# Altium PCB МПСУ.464342.21-005 T5M 2Layer.PcbDoc
Units mm, origin at the board's own origin, x right, y up, seen from the top; angles counter-clockwise.
Board outline 115 x 95 mm, 2 copper layers (Top Layer, Bottom Layer), stack 0.579 mm thick; 67 components, 36 nets, 235 pads, 12 vias.
Unrouted connection lines stored in the file: 81.
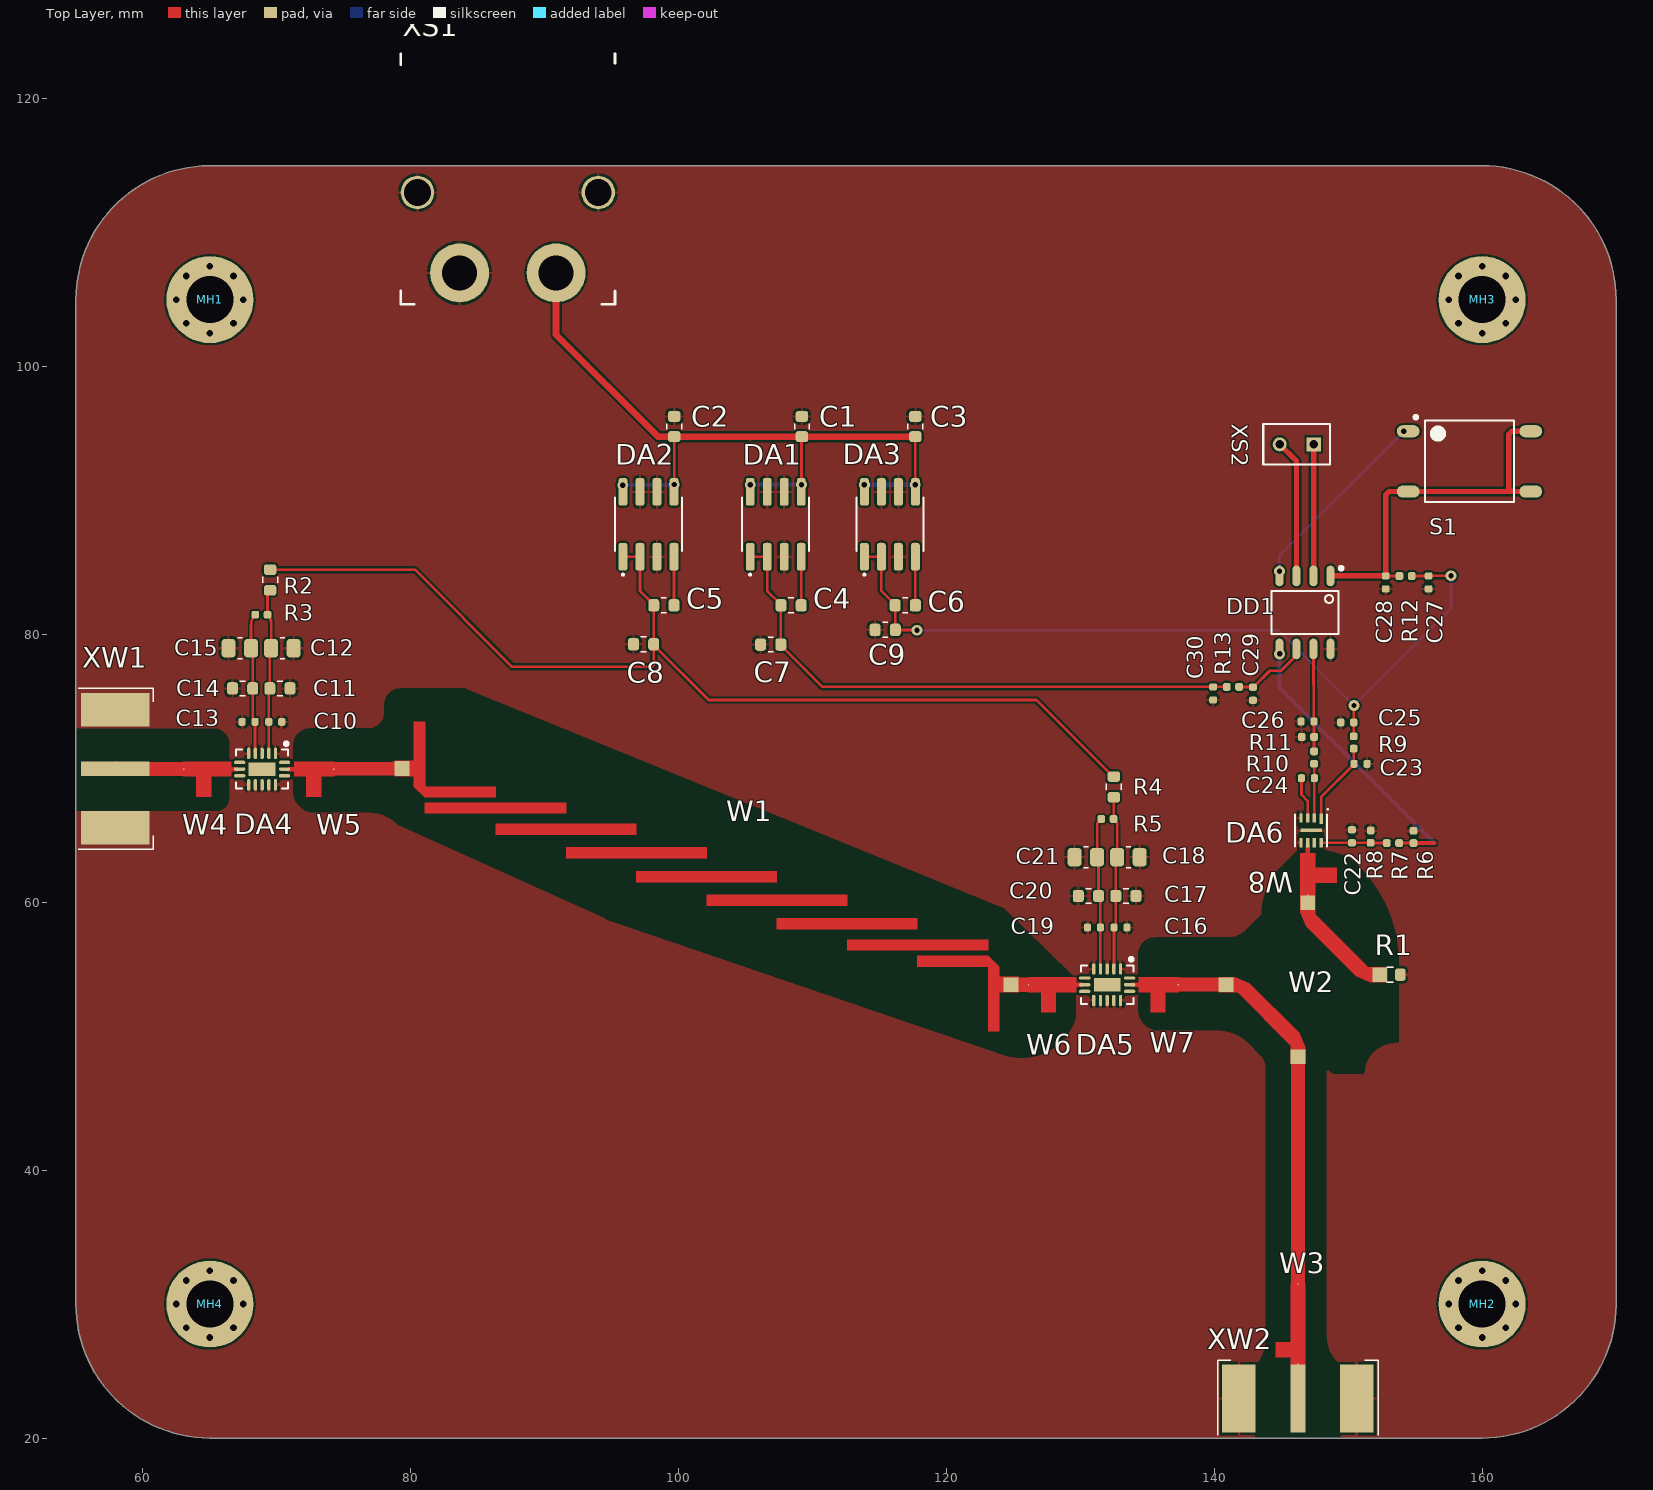
[diagram p0: Top Layer view]
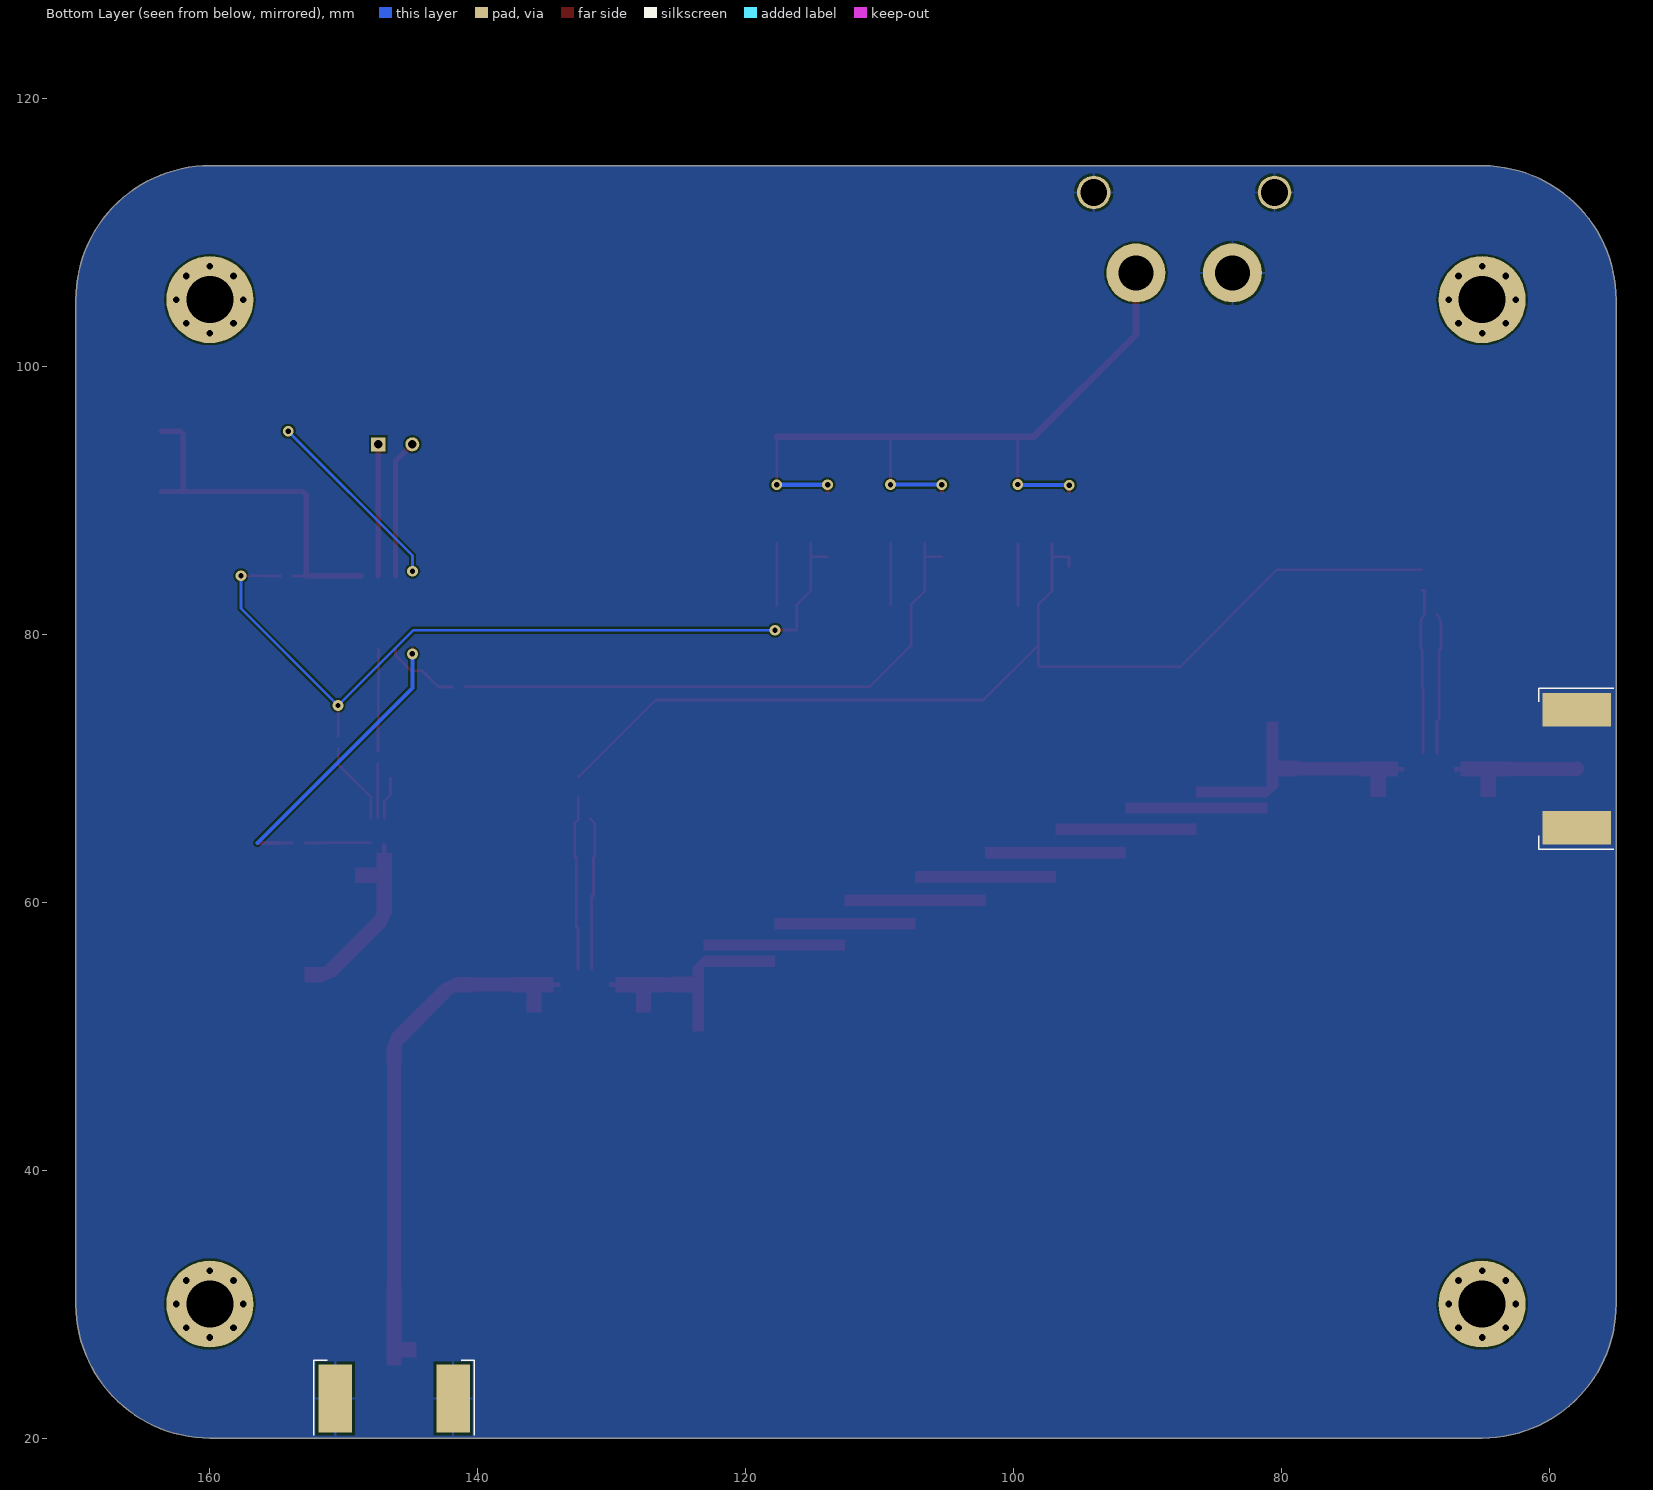
[diagram p1: Bottom Layer view, seen from below]

## Layer stack, top to bottom
Top Solder: solder mask 0.0102, Solder Resist, Dk 3.5
Top Layer: signal copper 0.0356
Dielectric 1: core 0.508, RO4350B, Dk 3.48
Bottom Layer: signal copper 0.0356
Bottom Solder: solder mask 0.0102, Solder Resist, Dk 3.5

## Board outline
54.999,30.036 55,104.987 cw(c65,105) 64.935,115 159.976,115 cw(c160,105) 170,104.973 170,29.948 cw(c160,30) 160.002,20 160.001,19.999 64.995,19.999 cw(c65,30)

## Design rules (kind name [scope] priority, off if disabled: settings)
AcuteAngle [All] p1: minimum=6.00000000000000E+0001 checktracksonly=FALSE
BoardOutlineClearance [OnCopper] p1: gap=0.25 ignorepadtopadclearanceinfootprint=FALSE except(0: Poly-OutlineEdge)
Clearance Clearance_RFGND [InComponentClass('RF') vs InNet('GND')] p1 off: gap=5 ignorepadtopadclearanceinfootprint=FALSE
Clearance [All] p2: gap=0.15 ignorepadtopadclearanceinfootprint=FALSE
ComponentClearance ComponentClearance_Matching [InComponentClass('RF')] p1: gap=-3 collisioncheckmode=3 verticalgap=2540 showdistances=FALSE
ComponentClearance [All] p2: gap=0.2 collisioncheckmode=3 verticalgap=2540 showdistances=TRUE
HoleSize [All] p1: absolutevalues=TRUE maxlimit=3.5 minlimit=0.4 maxpercent=80.000 minpercent=20.000
HoleToHoleClearance [All] p1: gap=0.2 allowstackedmicrovias=FALSE
MinimumAnnularRing MinimumAnnularRingVIA [IsVia] p1: minimumring=0.15
MinimumAnnularRing MinimumAnnularRingPAD [IsPad] p2: minimumring=0.2
MinimumSolderMaskSliver [All] p1: minsoldermaskwidth=0.15
PermittedLayers [All] p1: toplayerpermitted=TRUE bottomlayerpermitted=TRUE
PolygonConnect PolygonConnectMH [HasFootprint('MH_M3')] p1: connectstyle=Relief reliefconductorwidth=0.3 reliefentries=4 polygonreliefangle="90 Angle" airgapwidth=0.5
PolygonConnect PolygonConnectFilterGND [IsPad and InComponent('W1') and InNet('GND')] p2: connectstyle=Direct reliefconductorwidth=0.254 reliefentries=4 polygonreliefangle="90 Angle" airgapwidth=0.254
PolygonConnect PolygonConnectRFCons [InComponentClass('RFCons') and InNet('GND')] p3: connectstyle=Direct reliefconductorwidth=0.254 reliefentries=4 polygonreliefangle="90 Angle" airgapwidth=0.254
PolygonConnect PolygonConnectGNDVia [IsVia and InNet('GND')] p4: connectstyle=Direct reliefconductorwidth=0.254 reliefentries=4 polygonreliefangle="90 Angle" airgapwidth=0.254
PolygonConnect PolygonConnectRF [InNet('GND') and InComponentClass('RF')] p5: connectstyle=Relief reliefconductorwidth=0.2 reliefentries=4 polygonreliefangle="90 Angle" airgapwidth=0.2
PolygonConnect [All] p6: connectstyle=Relief reliefconductorwidth=0.2 reliefentries=4 polygonreliefangle="90 Angle" airgapwidth=0.2
RoutingCorners RoutingCorners_RF [InNetClass('RF')] p1: cornerstyle=Round minsetback=1.1 maxsetback=5
RoutingCorners [All] p2: cornerstyle=45-Degree minsetback=2.54 maxsetback=2.54
RoutingLayers RoutingLayersRF [InNetClass('RF')] p1: top layer_v5=TRUE bottom layer_v5=FALSE
RoutingLayers [All] p2: top layer_v5=TRUE bottom layer_v5=TRUE
RoutingVias [All] p1: holewidth=0.4 width=0.8 viastyle="Through Hole" minholewidth=0.4 minwidth=0.8 maxholewidth=0.4 maxwidth=0.8
SilkToSilkClearance [All] p1: silktosilkclearance=0.15
SilkToSolderMaskClearance [IsPad] p1: minsilkscreentomaskgap=0.15 clearancetoexposedcopper=TRUE
SolderMaskExpansion SolderMaskExpansionGNDVia [IsVia and InNet('GND')] p1: expansion=0.102 istentingtop=TRUE
SolderMaskExpansion [All] p2: expansion=0.05 istentingtop=FALSE
UnConnectedPin [All] p1:
Width WidthRF [InNetClass('RF')] p1: maxlimit=1.15 minlimit=1.05 preferedwidth=1.1
Width [All] p2: maxlimit=0.5 minlimit=0.2 preferedwidth=0.3
22 further rules are at their usual default settings.

## Classes and differential pairs
component class RFCons: XW1
component class RFDevices: DA4 DA5 DA6
component class RF: W1 W2 W3 W4 W5 W6 W7 W8
channel class "МПСУ.464342.21-005 Э3 Лист2": LNA1 LNA2
net class RF: LNA_RF_IN_LNA1 LNA_RF_IN_LNA2 LNA_RF_OUT_LNA1 LNA_RF_OUT_LNA2 LTC_RF_IN NetDA4_7 NetDA4_15 NetDA5_7 NetDA5_15 NetDA6_6 NetR1_2 NetW2_3 NetW3_2
component class "МПСУ.464342.21-005 Э3 Лист8": R1 W1 W2 W3 XS1 XW1 XW2
component class PowerManagment: C1 C2 C3 C4 C5 C6 C7 C8 C9 DA1 DA2 DA3
component class PowerDetector: C22 C23 C24 C25 C26 DA6 R6 R7 R8 R9 R10 R11 W8
component class Microcontroller: C27 C28 C29 C30 DD1 R12 R13 S1 XS2
component class LNA2: C16 C17 C18 C19 C20 C21 DA5 R4 R5 W6 W7
component class LNA1: C10 C11 C12 C13 C14 C15 DA4 R2 R3 W4 W5

## Components (designator, comment, footprint, x,y, rotation, side; value= is the part's Value field where it differs from the comment)
C1 "1 uF" CAPC160X80X90L30N 109.205,95.528 r270 top value="100 pF"
C2 "1 uF" CAPC160X80X90L30N 99.675,95.528 r270 top value="100 pF"
C3 "1 uF" CAPC160X80X90L30N 117.678,95.526 r270 top value="100 pF"
C4 "10 pF" CAPC160X80X90L30N 108.4,82.173 r0 top value="100 pF"
C5 "10 pF" CAPC160X80X90L30N 98.9,82.173 r0 top value="100 pF"
C6 "10 pF" CAPC160X80X90L30N 116.925,82.173 r0 top value="100 pF"
C7 "10 uF" CAPC160X80X90L30N 106.875,79.248 r0 top value="100 pF"
C8 "10 uF" CAPC160X80X90L30N 97.386,79.273 r0 top value="100 pF"
C9 "10 uF" CAPC160X80X90L30N 115.425,80.348 r0 top value="100 pF"
C10 "100 pF" CAPC100X50X55L20N 69.885,73.473 r180 top
C11 "1 uF" CAPC160X80X90L30N 70.23,75.973 r180 top value="100 pF"
C12 "0.33 uF" CAPC200X125X95L50N 70.415,78.973 r180 top value="100 pF"
C13 "100 pF" CAPC100X50X55L20N 67.89,73.473 r180 top
C14 "1 uF" CAPC160X80X90L30N 67.445,75.973 r180 top value="100 pF"
C15 "0.33 uF" CAPC200X125X95L50N 67.235,78.973 r180 top value="100 pF"
C16 "100 pF" CAPC100X50X55L20N 132.994,58.123 r180 top (schematic designator C10)
C17 "1 uF" CAPC160X80X90L30N 133.4,60.473 r180 top value="100 pF" (schematic designator C11)
C18 "0.33 uF" CAPC200X125X95L50N 133.59,63.373 r180 top value="100 pF" (schematic designator C12)
C19 "100 pF" CAPC100X50X55L20N 131.006,58.123 r180 top (schematic designator C13)
C20 "1 uF" CAPC160X80X90L30N 130.6,60.473 r180 top value="100 pF" (schematic designator C14)
C21 "0.33 uF" CAPC200X125X95L50N 130.41,63.373 r180 top value="100 pF" (schematic designator C15)
C22 "10 pF" CAPC100X50X55L20N 150.275,64.933 r270 top value="100 pF" (schematic designator C16)
C23 "OPT" CAPC100X50X55L20N 150.92,70.336 r180 top value="100 pF" (schematic designator C17)
C24 "10 nF" CAPC100X50X55L20N 146.99,69.273 r0 top value="100 pF" (schematic designator C18)
C25 "100 nF" CAPC100X50X55L20N 149.925,73.436 r0 top value="100 pF" (schematic designator C19)
C26 "1 uF" CAPC100X50X55L20N 146.96,73.498 r0 top value="100 pF" (schematic designator C20)
C27 "100 nF" CAPC100X50X55L20N 156,83.888 r90 top (schematic designator C21)
C28 "OPT" CAPC100X50X55L20N 152.8,83.888 r90 top (schematic designator C22)
C29 "OPT" CAPC100X50X55L20N 142.888,75.576 r90 top (schematic designator C23)
C30 "100 nF" CAPC100X50X55L20N 139.913,75.601 r90 top (schematic designator C24)
DA1 "LT1763-1.5" SOIC8P127_490X600X175L83X41N 107.25,88.223 r0 top
DA2 "LT1763-2.5" SOIC8P127_490X600X175L83X41N 97.75,88.223 r0 top
DA3 "LT1763-3.3" SOIC8P127_490X600X175L83X41N 115.775,88.223 r0 top
DA4 "PMA-183PLN+" JV2579 68.9,69.948 r180 top
DA5 "PMA-183PLN+" JV2579 132,53.848 r180 top (schematic designator DA4)
DA6 "LTC5597" LTC5597 147.225,65.373 r180 top (schematic designator DA5)
DD1 "PIC12F1822-I/SN" SN-SOIC127P600X175-8N 146.77,81.648 r270 top
MH1 "Comment" MH_M3 65,105 r0 top
MH2 "Comment" MH_M3 160,30 r0 top
MH3 "Comment" MH_M3 160,105 r0 top
MH4 "Comment" MH_M3 65,30 r0 top
R1 "50 Ohm" RESC160X80X60L30N 153.12,54.598 r180 top value=10
R2 "10 Ohm" RESC160X80X60L30N 69.5,84.068 r270 top value=10
R3 "180 Ohm" RESC100X50X40L25N 68.85,81.473 r180 top value=10
R4 "10 Ohm" RESC160X80X60L30N 132.5,68.618 r270 top value=10 (schematic designator R2)
R5 "180 Ohm" RESC100X50X40L25N 132.015,66.223 r180 top value=10 (schematic designator R3)
R6 "OPT" RESC100X50X40L25N 154.875,64.883 r270 top value=10 (schematic designator R4)
R7 "2 kOhm" RESC100X50X40L25N 153.34,64.423 r180 top value=10 (schematic designator R5)
R8 "3 k" RESC100X50X40L25N 151.675,64.908 r270 top value=10 (schematic designator R6)
R9 "1 Ohm" RESC100X50X40L25N 150.41,71.936 r90 top value=10 (schematic designator R7)
R10 "100 Ohm" RESC100X50X40L25N 147.45,70.808 r90 top value=10 (schematic designator R8)
R11 "OPT" RESC100X50X40L25N 146.99,72.348 r0 top value=10 (schematic designator R9)
R12 "1 Ohm" RESC100X50X40L25N 154.285,84.363 r0 top (schematic designator R10)
R13 "1 Ohm" RESC100X50X40L25N 141.393,76.086 r180 top value=10 (schematic designator R11)
S1 "L-KLS7-TS6604-4.3-180-B" DIP2_SOIC450P1000X350-4N 159.05,92.925 r0 top
W1 "Filter" MFilter8_5G 78.8,69.996 r0 top net-tie
W2 "Colinear Coupler" CLCoupler 146.975,59.973 r270 top net-tie
W3 "Matching" MATCHING_MAIN_OUT 146.243,31.549 r270 top net-tie
W4 "Matching" MATCHING_LNA_IN 67.1,69.948 r0 top net-tie
W5 "Matching" MATCHING_LNA_OUT 70.8,69.948 r0 top net-tie
W6 "Matching" MATCHING_LNA_IN 130.175,53.848 r0 top net-tie (schematic designator W4)
W7 "Matching" MATCHING_LNA_OUT 133.85,53.848 r0 top net-tie (schematic designator W5)
W8 "Matching" MATCHING_LTC_IN 146.975,64.373 r90 top net-tie (schematic designator W6)
XS1 "XT-60-PW-F" XT-60-PW-F 87.25,107 r0 top
XS2 "PBD-2 2x1" RHDRV2W45P254_1X2_304X500H500 147.425,94.198 r270 top
XW1 "MOLEX 73251-1153" "MOLEX 73251-1153 - 1.1pin" 54.975,69.973 r0 top
XW2 "MOLEX 73251-1153" "MOLEX 73251-1153 - 1.1pin" 146.243,19.999 r90 top

## Footprints (in the part's own frame and the unit in brackets; to place one, negate y for a bottom-side part, rotate by r counter-clockwise, add the part's x,y. Pads: shape width x height; smd on the part's side, far side on the other; paste and mask are expansions set on the pad)
CAPC100X50X55L20N [mm] "Capacitor, Chip; 1.00 mm L X 0.50 mm W X 0.55 mm H body"
  rrect49% 0.53x0.58 smd: 1(-0.485,0) 2(0.485,0)
  body extent -0.5,-0.25 0.5,0.25, height 0.55
CAPC160X80X90L30N [mm] "Capacitor, Chip; 1.60 mm L X 0.80 mm W X 0.90 mm H body"
  rrect51% 0.82x0.93 smd: 1(-0.755,0) 2(0.755,0)
  silkscreen extent -0.2,-0.55 0.2,0.55, body extent -0.8,-0.4 0.8,0.4, height 0.9
CAPC200X125X95L50N [mm] "Capacitor, Chip; 2.00 mm L X 1.25 mm W X 0.95 mm H body"
  rrect48% 1.05x1.38 smd: 1(-0.84,0) 2(0.84,0)
  silkscreen extent -0.17,-0.78 0.17,0.78, body extent -1,-0.63 1,0.63, height 0.95
CLCoupler [mm] "Coupler 40 dB, diel RO4003 0.5 oz ED 20 mil"
  rect 1.1x1.1 smd paste-0.55 mask-0.55: 1(0,0) 2(5.375,5.375) 3(11.5,-0.725) 4(6.125,-6.1)
  Top Layer region: -0.55,-0.55 -0.55,0.55 0.875,0.549 0.987,0.67 4.713,4.397 4.825,4.5 4.825,5.925 5.925,5.925 5.925,4.675 5.491,3.619 1.765,-0.108 0.7,-0.55
  Top Layer region: 5.575,-6.65 5.575,-5.42 6.007,-4.35 9.725,-0.625 10.8,-0.175 12.05,-0.175 12.05,-1.275 10.65,-1.275 10.525,-1.4 6.785,-5.128 6.675,-5.25 6.675,-6.65
DIP2_SOIC450P1000X350-4N [mm] "SOIP=C, 4-Leads, Body 6,00x6,00mm, Pitch 4,50mm, IPC Medium Density"
  oval 1.7x0.9 smd: 1(-4.575,2.25) 2(-4.575,-2.25) 3(4.575,-2.25) 4(4.575,2.25)
  silkscreen extent -4.12,-3.05 3.32,3.42, body extent -4.5,-3 4.5,3, height 7.17
JV2579 [mm] "QFN, 17-Leads, Body   2.5x3.5mm, Pitch 0.51mm, Thermal Pad 2x1mm, IPC Medium Density"
  oval 0.25x0.85 smd: 1(-1,-1.175) 2(-0.5,-1.175) 3(0,-1.175) 4(0.5,-1.175) 5(1,-1.175) 9(1,1.175) 10(0.5,1.175) 11(0,1.175) 12(-0.5,1.175) 13(-1,1.175)
  oval 0.85x0.25 smd: 6(1.675,-0.5) 7(1.675,0) 8(1.675,0.5) 14(-1.675,0.5) 15(-1.675,0) 16(-1.675,-0.5)
  rect 2x1 smd: 17(0,0)
  silkscreen extent -1.95,-2.02 1.95,1.45, body extent -1.8,-1.3 1.8,1.3, height 0.85
LTC5597 [mm] "DFN 8-Leads, Body 2,00x2,00mm, Pitch 0,50mm, Thermal Pad 1,60x0,25mm, IPC Medium Density"
  rect 0.25x0.8 smd: 1(-0.75,-0.875)
  rect 0.25x0.7 smd: 2(-0.25,-0.925) 3(0.25,-0.925) 4(0.75,-0.925) 5(0.75,0.925) 6(0.25,0.925) 7(-0.25,0.925) 8(-0.75,0.925)
  rect 1.6x0.25 smd: 9(0,0)
  silkscreen extent -1.3,-1.62 1.2,1.2, body extent -1.05,-1.1 1.05,1.1, height 0.8
MATCHING_LNA_IN [mm]
  rect 0.1x0.1 smd paste-0.05 mask-0.05: 1(-4.05,0) 2(0,0)
  Top Layer region: -3.1,-2.05 -3.1,-0.55 -4.1,-0.55 -4.1,0.55 -0.5,0.55 -0.5,0.15 0,0.15 0,-0.15 -0.5,-0.15 -0.5,-0.55 -2,-0.55 -2,-2.05
MATCHING_LNA_OUT [mm]
  rect 0.1x0.1 smd paste-0.05 mask-0.05: 1(0,0) 2(3.45,0)
  Top Layer region: 0.5,-0.55 0.5,-0.15 0,-0.15 0,0.15 0.5,0.15 0.5,0.55 3.5,0.55 3.5,-0.55 2.5,-0.55 2.5,-2.05 1.4,-2.05 1.4,-0.55
MATCHING_LTC_IN [mm]
  rect 0.1x0.1 smd paste-0.05 mask-0.05: 1(-3.85,0) 2(0,0)
  Top Layer region: -2.9,-2.15 -2.9,-0.55 -3.9,-0.55 -3.9,0.55 -0.7,0.55 -0.7,0.15 0,0.15 0,-0.15 -0.7,-0.15 -0.7,-0.55 -1.8,-0.55 -1.8,-2.15
MATCHING_MAIN_OUT [mm]
  rect 0.1x0.1 smd paste-0.05 mask-0.05: 1(0.05,0) 2(6.05,0)
  Top Layer region: 0,-0.55 0,0.55 6.1,0.55 6.1,-0.55 5.5,-0.55 5.5,-1.65 4.4,-1.65 4.4,-0.55
MFilter8_5G [mm] "Bandpass filter, Fc 8.50GHz, BW  500 MHz, type - Coupled Microstrip Filter, diel RO4003 0.5 oz ED 20 mil"
  rect 1.1x1.1 smd paste-0.55 mask-0.55: 1(0.55,0) 2(46.025,-16.146)
  Top Layer region: 0,-0.577 0,0.577 1.432,0.577 1.432,3.476 2.279,3.476 2.279,-1.352 7.555,-1.352 7.555,-2.146 2.253,-2.146 1.432,-1.352 1.432,-0.577
  Top Layer region: 2.253,-3.36 2.253,-2.566 12.8,-2.566 12.8,-3.36
  Top Layer region: 7.555,-4.962 18.045,-4.964 18.045,-4.14 7.555,-4.142
  Top Layer region: 12.8,-6.7 12.8,-5.877 18.045,-5.877 18.045,-5.876 23.293,-5.876 23.293,-6.7 18.045,-6.7 18.045,-6.7
  Top Layer region: 18.045,-8.485 18.045,-7.661 23.293,-7.661 28.541,-7.661 28.541,-8.485 23.293,-8.485
  Top Layer region: 23.293,-10.27 28.541,-10.27 28.541,-10.269 33.786,-10.269 33.786,-9.446 28.541,-9.446 28.541,-9.446 23.293,-9.446
  Top Layer region: 28.541,-12.006 33.786,-12.006 33.786,-12.004 39.031,-12.004 39.031,-11.184 33.786,-11.184 33.786,-11.182 28.541,-11.182
  Top Layer region: 33.786,-13.581 33.786,-12.786 44.333,-12.786 44.333,-13.581
  Top Layer region: 44.307,-15.568 44.307,-14.794 39.031,-14.794 39.031,-14 44.333,-14 45.154,-14.794 45.154,-15.569 46.586,-15.569 46.586,-16.723 45.154,-16.723 45.154,-19.622 44.307,-19.622
MH_M3 [mm] "Mounting Hole M3 with 8 vias"
  round 0.8 hole 0.5: 1(-2.5,0) 1(-1.768,-1.768) 1(-1.768,1.768) 1(0,-2.5) 1(0,2.5) 1(1.768,-1.768) 1(1.768,1.768) 1(2.5,0)
  round 6.5 hole 3.5 paste-6.5: MH1(0,0)
"MOLEX 73251-1153 - 1.1pin" [mm] "MOLEX 50 Ohms, SMA Jack Receptacle, Edge Mount, .25µm Gold (Au) Plating"
  rect 5.1x1.1 smd: 1(2.95,0)
  rect 5.1x2.5 smd: 2(2.95,-4.4) 2(2.95,4.4)
  rect 5.1x2.5 smd far side: 2(2.95,-4.4) 2(2.95,4.4)
  silkscreen extent 0.2,-6 5.8,6, body extent -9.5,-4.76 4.77,4.76, height 4.36
RESC100X50X40L25N [mm] "Resistor, Chip; 1.00 mm L X 0.50 mm W X 0.40 mm H body"
  rrect52% 0.58x0.58 smd: 1(-0.46,0) 2(0.46,0)
  body extent -0.5,-0.25 0.5,0.25, height 0.4
RESC160X80X60L30N [mm] "Resistor, Chip; 1.60 mm L X 0.80 mm W X 0.60 mm H body"
  rrect51% 0.79x0.93 smd: 1(-0.77,0) 2(0.77,0)
  silkscreen extent -0.23,-0.56 0.23,0.56, body extent -0.8,-0.4 0.8,0.4, height 0.6
RHDRV2W45P254_1X2_304X500H500 [mm] "Header, Vertical Receptacle, 2.54 mm pitch; 0.45 mm lead width, 2 pins, 2 rows, 1 pin per row, 3.04 mm L X 5.00 mm W X 5.00 mm H body"
  rect 1.05x1.05 / inner round 1.05 / far side rect 1.05x1.05 hole 0.65 paste-1.05: 1(0,0)
  round 1.05 hole 0.65 paste-1.05: 2(0,-2.54)
  silkscreen extent -1.5,-3.77 1.5,1.23, body extent -1.52,-3.77 1.52,1.23, height 5
SN-SOIC127P600X175-8N [mm] "SOIC, 8-Leads, Body 4.90x3.90mm, Pitch 1.27mm, IPC Medium Density"
  oval 1.55x0.6 smd: 1(-2.725,1.905) 2(-2.725,0.635) 3(-2.725,-0.635) 4(-2.725,-1.905) 5(2.725,-1.905) 6(2.725,-0.635) 7(2.725,0.635) 8(2.725,1.905)
  silkscreen extent -3.42,-2.5 1.6,2.83, body extent -3,-2.5 3,2.5, height 1.75
SOIC8P127_490X600X175L83X41N [mm] "Small Outline IC (SOIC), 1.27 mm pitch; 8 pin, 4.90 mm L X 3.90 mm W X 1.75 mm H body"
  rrect52% 0.66x2.07 smd: 1(-1.905,-2.425) 2(-0.635,-2.425) 3(0.635,-2.425) 4(1.905,-2.425) 5(1.905,2.425) 6(0.635,2.425) 7(-0.635,2.425) 8(-1.905,2.425)
  silkscreen extent -2.5,-3.83 2.5,2, body extent -2.45,-3 2.45,3, height 1.75
XT-60-PW-F [mm]
  round 4.4 hole 2.6: 1(-3.6,0) 2(3.6,0)
  round 2.5 hole 2: 3(-6.75,6) 3(6.75,6)
  silkscreen extent -8,-2.35 8,16.35, body extent -7.75,-1.85 7.75,15.35, height 8.4

## Part data
C1 C2 C3 C4 C5 C6 C7 C8 C9 C10 C11 C12 C13 C14 C15 C16 C17 C18 C19 C20 C21 C22 C23 C24 C25 C26 C27 C28 C29 C30: library part Capacitor, "Capacitor, generic", Package=0402
DA1 DA2 DA3: library part LT1763, "Micropower DC/DC Converters in SOIC8", Manufacturer="Analog Devices"
DA4 DA5: "SMT Low Noise Amplifier, 6000 - 18000 MHz, 50Ω", Manufacturer=Mini-Circuits, ComponentLink1Description=ProductPage, ComponentLink1URL=https://www.minicircuits.com/WebStore/dashboard.html?model=PMA-183PLN%2B, PartNumber=PMA-183PLN+
DA6: "100MHz to 70GHz Linear-in-dB RMS Power Detector with 35dB Dynamic Range", Manufacturer="Analog Devices", ComponentLink1Description="Product Page", ComponentLink1URL=https://www.analog.com/en/products/ltc5597.html#product-overview, PartNumber=LTC5597
DD1: library part PIC12(L)F1822, "8-bit Flash Microcontrollers with XLP Technology 3.5 KB, 128 B", PartNumber=PIC12F1822-I/SN
R1 R2 R3 R4 R5 R6 R7 R8 R9 R10 R11 R12 R13: library part Resistor, "Resistor, generic", Package=0402
S1: library part KLS7-TS6601-7, "Tact Switch", Manufacturer="KLS electronic co ltd", ComponentLink1Description=DataSheet, ComponentLink1URL=https://static.chipdip.ru/lib/551/DOC001551970.pdf, PartNumber=L-KLS7-TS6604-4.3-180-B
W1: library part "Filter 8.5G", "Bandpass filter, Fc 8.50GHz, BW  500 MHz, type - Coupled Microstrip Filter, diel RO4003 0.5 oz ED 20 mil"
W2: library part CLCoupler, "Coupler 40 dB, diel RO4003 0.5 oz ED 20 mil"
W3 W8: library part Matching_1
W4 W5 W6 W7: library part Matching_1, "Matching MTEE"
XS1: "Header, Right-angle, 2x1", Manufactorer="Changzhou Amass Electronics CO.LTD.", Category=Connector, ComponentLink1Description=DataSheet, ComponentLink1URL=https://www.tme.eu/ru/Document/9b8d0c5eb7094295f3d3112c214d3ade/XT60PW%20SPEC.pdf, Net1=+12V, Net2=GND, PartNumber=XT-60-PW-F
XS2: library part PBD-2, "Header, Vertical Receptacle, 2.54 mm pitch 2x1", Net1=RX, Net2=TX, PartNumber="PBD-2 2x1"
XW1 XW2: "MOLEX 73251-1153 (SMA EDGE)", Manufacturer=Molex, PartNumber="MOLEX 73251-1153"

## Via types
v1: diameter 0.8, hole 0.4, Top Layer to Bottom Layer, 12 vias

## Nets (pads, with @x,y where several pads share a name; then routed paths per layer and width w, separated by ;. In a path a pad name is that pad's centre, name@x,y a point inside that pad or via, vN(x,y) a via of type N, cw(c..) or ccw(c..) an arc to the next point about the centre after c; other vN are vias at no path point)
+1.5V: C4.1 C7.2 C30.2 DA1.1 DA1.2 R13.2 | length 43.9
  Top Layer w0.2: DA1.1 DA1.2 ; DA1.2@106.615,86.798 106.615,83.258 107.645,82.228 C4.1 107.638,82.166 107.638,79.256 C7.2 107.63,79.193 110.738,76.086 C30.2 R13.2
+2.5V: C5.1 C8.2 DA2.1 DA2.2 R2.1 R4.1 | length 81.6
  Top Layer w0.2: R2.1 80.312,84.838 87.569,77.581 98.023,77.581 98.141,77.698 C8.2@98.141,79.218 ; DA2.1@95.845,85.083 DA2.1 DA2.2 ; DA2.2@97.115,86.798 97.115,83.258 98.145,82.228 C5.1 98.143,82.171 98.143,79.276 C8.2 C8.2@98.141,79.218 ; R4.1 132.43,69.388 126.71,75.109 102.25,75.109 C8.2@98.141,79.218
+3.3V: C6.1 C9.2 C25.2 C27.2 DA3.1 DA3.2 R9.2 R12.2 | length 62.7
  Top Layer w0.2: DA3.1 DA3.2 ; DA3.2@115.14,86.798 115.14,83.258 116.175,82.223 116.175,80.353 C9.2 116.193,80.336 117.788,80.336 v1(117.8,80.323) ; R9.2 C25.2 150.423,73.448 150.423,74.686 v1(150.435,74.698) ; R12.2 154.75,84.368 155.995,84.368 C27.2 156.006,84.38 157.669,84.38 v1(157.675,84.386)
  Bottom Layer w0.2: v1(117.8,80.323) 144.81,80.323 v1(150.435,74.698) 157.675,81.938 v1(157.675,84.386)
ADC_IN: C26.2 DD1.7 R10.2 R11.2 | length 7.7
  Top Layer w0.2: DD1.7@147.425,78.903 DD1.7 147.425,73.518 C26.2 147.447,73.496 147.447,72.351 R11.2 R10.2
ADC_VREF: C29.2 DD1.6 R13.1 | length 5.8
  Top Layer w0.2: R13.1 141.865,76.073 142.875,76.073 C29.2 142.913,76.061 144.141,77.29 144.976,77.29 146.135,78.448 DD1.6
DC_IN: C1.2 C2.2 C3.2 DA1.5 DA1.8 DA2.5 DA2.8 DA3.5 DA3.8 XS1.2 | length 58.5
  Top Layer w0.2: v1(99.665,91.198) 99.665,94.763 C2.2 ; v1(109.18,91.19) 109.18,94.748 C1.2 ; v1(117.678,91.178) C3.2
  Top Layer w0.3: v1(95.825,91.148) 95.845,91.128 DA2.8 ; DA1.8 105.345,91.168 v1(105.35,91.173) ; DA3.8 113.87,91.177 v1(113.875,91.182)
  Top Layer w0.5: XS1.2 90.85,102.382 98.46,94.772 C2.2 C2.2 105.29,94.773 ; 105.345,94.718 105.29,94.773 ; C3.2 117.676,94.772 109.206,94.772 C1.2 105.29,94.773
  Bottom Layer w0.3: v1(95.825,91.148) 95.85,91.173 99.64,91.173 v1(99.665,91.198) ; v1(105.35,91.173) 105.359,91.182 109.171,91.182 v1(109.18,91.19) ; v1(113.875,91.182) v1(113.875,91.182) 117.676,91.18 v1(117.678,91.178)
EN: DD1.5 R6.2 R7.1 | length 21.9
  Top Layer w0.2: R7.1 R6.2
  Top Layer w0.3: DD1.5 144.865,78.558 v1(144.875,78.548) ; R6.2 156.45,64.423
  Bottom Layer w0.3: v1(144.875,78.548) 144.875,75.998 156.45,64.423
GND: C1.1 C2.1 C3.1 C7.1 C8.1 C9.1 C10.1 C11.1 C12.1 C13.2 C14.2 C15.2 C16.1 C17.1 C18.1 C19.2 C20.2 C21.2 C22.1 C23.1 C25.1 C26.1 C27.1 C28.1 C29.1 C30.1 DA1.3 DA1.6 DA1.7 DA2.3 DA2.6 DA2.7 DA3.3 DA3.6 DA3.7 DA4.1 DA4.3 DA4.5 DA4.6 DA4.8 DA4.9 DA4.10 DA4.11 DA4.12 DA4.13 DA4.14 DA4.16 DA4.17 DA5.1 DA5.3 DA5.5 DA5.6 DA5.8 DA5.9 DA5.10 DA5.11 DA5.12 DA5.13 DA5.14 DA5.16 DA5.17 DA6.4 DA6.5 DA6.7 DA6.9 DD1.8 R1.1 R6.1 R8.1 R11.1 XS1.1 XS1.3 XW1.2 XW2.2
LNA_RF_IN_LNA1: W4.1 XW1.1 | length 5.1
  Top Layer w1.05: XW1.1 ccw(c57.985,70.034) 57.985,69.948 W4.1
LNA_RF_IN_LNA2: W1.2 W6.1 | length 1.3
  Top Layer w1.1: W1.2 W6.1@126.111,53.85 ; W6.1@126.111,53.848 W6.1
LNA_RF_OUT_LNA1: W1.1 W5.2 | length 4.5
  Top Layer w1.05: W5.2 78.75,69.994
LNA_RF_OUT_LNA2: W2.4 W7.2 | length 3.6
  Top Layer w1.05: W7.2 137.755,53.848 W2.4
LTC_RF_IN: W2.1 W8.1
NetC4_2: C4.2 DA1.4 | length 4.6
  Top Layer w0.2: C4.2 DA1.4@109.155,86.798
NetC5_2: C5.2 DA2.4 | length 4.6
  Top Layer w0.2: C5.2 DA2.4@99.655,86.798
NetC6_2: C6.2 DA3.4 | length 4.6
  Top Layer w0.2: C6.2 DA3.4@117.68,86.798
NetC10_2: C10.2 C11.2 C12.2 DA4.2 R2.2 R3.1 | length 12.5
  Top Layer w0.2: DA4.2 C10.2 69.4,75.792 cw(c69.656,75.792) C11.2 69.475,78.732 cw(c69.816,78.732) C12.2 69.575,80.833 ccw(c68.67,80.833) R3.1 69.31,83.298 R2.2
NetC13_1: C13.1 C14.1 C15.1 DA4.4 R3.2 | length 10.5
  Top Layer w0.2: R3.2 ccw(c69.15,80.713) 68.075,80.713 C15.1 cw(c67.773,78.671) 68.2,78.671 C14.1 68.2,73.896 ccw(c68.797,73.896) C13.1 68.375,71.184 ccw(c68.46,71.184) DA4.4
NetC16_2: C16.2 C17.2 C18.2 DA5.2 R4.2 R5.1 | length 13.2
  Top Layer w0.2: DA5.2 132.509,55.023 C16.2 132.645,58.123 C17.2 132.645,63.373 C18.2 132.75,65.921 132.475,66.196 R5.1 132.488,66.236 132.488,67.836 R4.2
NetC19_1: C19.1 C20.1 C21.1 DA5.4 R5.2 | length 11.6
  Top Layer w0.2: DA5.4 131.491,55.023 C19.1 131.491,60.473 C20.1 131.355,63.373 C21.1 131.25,65.891 131.555,66.196 R5.2
NetC22_2: C22.2 DA6.8 R7.2 R8.2 | length 4.9
  Top Layer w0.2: DA6.8 C22.2 R8.2 151.687,64.436 152.867,64.436 R7.2
NetC23_2: C23.2 DA6.1 R9.1 | length 6.3
  Top Layer w0.2: DA6.1 147.975,67.851 150.435,70.311 C23.2 150.423,70.348 150.423,71.463 R9.1
NetC24_1: C24.1 DA6.3 | length 3.2
  Top Layer w0.2: C24.1 146.505,68.039 146.975,67.569 DA6.3
NetC24_2: C24.2 DA6.2 R10.1 | length 4.1
  Top Layer w0.2: R10.1 147.462,70.336 147.462,69.286 C24.2 DA6.2
NetDA4_7: DA4.7 W4.2
NetDA4_15: DA4.15 W5.1
NetDA5_7: DA5.7 W6.2
NetDA5_15: DA5.15 W7.1
NetDA6_6: DA6.6 W8.2
NetDD1_4: DD1.4 S1.1 | length 14.3
  Bottom Layer w0.2: v1(144.865,84.73) 144.865,85.89 v1(154.15,95.175)
NetR1_2: R1.2 W2.2
NetW2_3: W2.3 W3.1 | length 17
  Top Layer w1.05: W3.1 146.243,31.954 146.25,31.961 W2.3
NetW3_2: W3.2 XW2.1
RX: DD1.2 XS2.1 | length 9.8
  Top Layer w0.4: DD1.2 147.415,84.383 147.415,94.188 XS2.1
TX: DD1.3 XS2.2 | length 10.3
  Top Layer w0.4: XS2.2 146.135,92.948 DD1.3
VCC: C28.2 DD1.1 R12.1 S1.2 S1.3 S1.4 | length 28.2
  Top Layer w0.2: C28.2 152.805,84.368 153.82,84.368 R12.1
  Top Layer w0.4: DD1.1 C28.2 152.8,84.426 152.813,84.438 152.813,90.441 153.047,90.675 162.209,90.675 ; S1.3 162.209,90.675 ; S1.4 162.209,95.175 161.975,94.941 161.975,90.909 162.092,90.792 162.209,90.675
pads on no net: MH1.1 MH1.MH1 MH2.1 MH2.MH1 MH3.1 MH3.MH1 MH4.1 MH4.MH1

## Polygon pours and split planes (outlines as drawn)
GND on Top Layer "GND_L01_P000" (solid, pour order 0): 54.999,30.036 55,104.987 cw(c65,105) 64.935,115 159.976,115 cw(c160,105) 170,104.973 170,29.948 cw(c160,30) 160.002,20 160.001,19.999 64.995,19.999 cw(c65,30)
GND on Bottom Layer "GND_L02_P002" (solid, pour order 2): 54.999,30.036 55,104.987 cw(c65,105) 64.935,115 159.976,115 cw(c160,105) 170,104.973 170,29.948 cw(c160,30) 160.002,20 160.001,19.999 64.995,19.999 cw(c65,30)

## Other copper
Top Layer:
  pour cut-out: 143.093,20.598 143.093,25.499 ccw(c141.393,27.199) 143.797,27.199 143.797,42.975 148.414,42.975 148.414,27.58 ccw(c151.074,27.58) 149.193,25.699 cw(c148.71,25.216) 149.393,25.216 149.393,20.039 cw(c149.337,20.039) 149.376,19.999 143.081,19.999
  pour cut-out: 141,57.4 ccw(c141,59.331) 142.366,57.966 143.5,59.1 cw(c148.57,59.1) 144.985,62.685 146.2,63.9 147.903,63.9 cw(c147.903,59.803) 150.8,62.7 cw(c143.557,55.457) 153.8,55.457 153.8,49.5 ccw(c153.628,47.05) 151.178,47.222 150.579,47.153 cw(c151.134,47.052) 151.236,47.607 cw(c150.914,47.444) 151.078,47.122 151.078,47.153 149.117,47.153 cw(c149.117,47.87) 148.4,47.87 148.4,50.23 ccw(c145.334,50.23) 147.502,52.398 143.398,56.502 141.23,56.502
  pour cut-out: 54.999,73.106 ccw(c55.256,73.363) 55.256,73 65.23,73 cw(c65.23,71.73) 66.5,71.73 66.5,70.7 71.2,70.7 71.2,71.73 cw(c72.47,71.73) 72.47,73 76.8,73 ccw(c76.8,74.2) 78,74.2 78,74.73 cw(c79.27,74.73) 79.27,76 83.768,76 cw(c83.889,75.418) 84.215,75.915 124.3,59.55 129.359,54.641 ccw(c129.7,54.983) 129.7,54.5 134.3,54.5 134.3,56.13 cw(c135.57,56.13) 135.57,57.4 141.115,57.4 cw(c141.115,54.057) 143.479,56.421 147.502,52.398 cw(c145.335,50.231) 148.4,50.23 148.4,47.87 148.4,41.068 145.07,41.068 cw(c145.07,42.338) 143.8,42.338 143.8,47.7 ccw(c142.594,47.7) 143.446,48.554 142.498,49.502 ccw(c140.331,47.335) 140.33,50.4 135.907,50.4 cw(c135.907,52.007) 134.3,52.007 134.3,53.2 129.7,53.2 129.7,51.393 cw(c125.627,52.626) 124.393,48.554 94.6,58.7 cw(c94.671,58.871) 94.5,58.8 78.998,65.802 ccw(c76.831,63.636) 76.83,66.7 72.766,66.7 cw(c72.766,68.266) 71.2,68.266 71.2,69.3 66.7,69.3 ccw(c66.7,69.1) 66.5,69.1 66.5,67.862 cw(c65.43,67.862) 65.43,66.792 54.999,66.792